# EAGLE board 5.4 (EAGLE 9.7.0)

Size 113.05 x 53.5 mm. Coordinates in mm from the lower left corner, seen from the top.
Outline: 0,0 113.05,0 113.05,53.5 0,53.5 0,0
Copper layers (1*16): Top 0.035mm / dielectric 1.5mm / Bottom 0.035mm
Design rules "default": minimum track width 6mil, minimum drill 0.35mm, track to track 6mil, track to pad 6mil, pad to pad 6mil, via to via 6mil, smd to smd 6mil, copper to edge 40mil, drill to drill 6mil, minimum pad ring 10mil, minimum via ring 8mil, stop-mask expansion 4mil, vias tented up to drill 0mil, thermal gap 10mil

## Footprints (pad centres in the part's own frame; a part is rotated, then mirrored left to right if it is on the bottom)
BATTERY-GENERIC = drill 1.118 pad 3.15 octagon: + 2.54,0; - -2.54,0
LEDRD254W60D565H860B_G = drill 0.981 pad 1.581: 1 -1.27,0; 2 1.27,0
LEDRD254W60D565H860B_Y = drill 0.981 pad 1.581: 1 -1.27,0; 2 1.27,0
LEDRD254W60D565H860B_B = drill 0.981 pad 1.581: 1 -1.27,0; 2 1.27,0
RESAD1016W63L850D250B = drill 0.83 pad 1.43: 1 -5.08,0; 2 5.08,0
SWITCH-SPDT-PTH-8.5X3.7MM = drill 1.016 pad 1.88: 1 -2.54,0; 2 0,0; 3 2.54,0
DIP762W53P254L1969H508Q16B = drill 0.743 pad 1.343: 1 -3.81,8.89; 2 -3.81,6.35; 3 -3.81,3.81; 4 -3.81,1.27; 5 -3.81,-1.27; 6 -3.81,-3.81; 7 -3.81,-6.35; 8 -3.81,-8.89; 9 3.81,-8.89; 10 3.81,-6.35; 11 3.81,-3.81; 12 3.81,-1.27; 13 3.81,1.27; 14 3.81,3.81; 15 3.81,6.35; 16 3.81,8.89

## Placement (x,y rotation side)
BAT2  4.5V  [BATTERY-GENERIC]  8.26,25.62 270 top
D1  GREEN  [LEDRD254W60D565H860B_G]  21.89,21.67 180 top
D2  GREEN  [LEDRD254W60D565H860B_G]  29.51,21.67 180 top
D3  GREEN  [LEDRD254W60D565H860B_G]  37.13,21.67 180 top
D4  GREEN  [LEDRD254W60D565H860B_G]  44.75,21.67 180 top
D5  YELLOW  [LEDRD254W60D565H860B_Y]  54.91,21.67 180 top
D6  YELLOW  [LEDRD254W60D565H860B_Y]  62.53,21.67 180 top
D7  YELLOW  [LEDRD254W60D565H860B_Y]  70.15,21.67 180 top
D8  YELLOW  [LEDRD254W60D565H860B_Y]  77.77,21.67 180 top
D9  BLUE  [LEDRD254W60D565H860B_B]  47.29,34.37 180 top
D10  BLUE  [LEDRD254W60D565H860B_B]  54.91,34.37 180 top
D11  BLUE  [LEDRD254W60D565H860B_B]  62.53,34.37 180 top
D12  BLUE  [LEDRD254W60D565H860B_B]  70.15,34.37 180 top
D13  BLUE  [LEDRD254W60D565H860B_B]  77.77,34.37 180 top
R1  220  [RESAD1016W63L850D250B]  46.02,44.53 90 top
R2  220  [RESAD1016W63L850D250B]  53.64,44.53 90 top
R3  220  [RESAD1016W63L850D250B]  61.26,44.53 90 top
R4  220  [RESAD1016W63L850D250B]  68.88,44.53 90 top
R5  220  [RESAD1016W63L850D250B]  20.62,8.97 90 top
R6  220  [RESAD1016W63L850D250B]  28.24,8.97 90 top
R7  220  [RESAD1016W63L850D250B]  35.86,8.97 90 top
R8  220  [RESAD1016W63L850D250B]  43.48,8.97 90 top
R9  220  [RESAD1016W63L850D250B]  53.64,8.97 90 top
R10  220  [RESAD1016W63L850D250B]  61.26,8.97 90 top
R11  220  [RESAD1016W63L850D250B]  68.88,8.97 90 top
R12  220  [RESAD1016W63L850D250B]  76.5,8.97 90 top
R13  220  [RESAD1016W63L850D250B]  76.5,44.53 90 top
S1  TOGGLE  [SWITCH-SPDT-PTH-8.5X3.7MM]  23.16,16.59 0 top
S2  TOGGLE  [SWITCH-SPDT-PTH-8.5X3.7MM]  30.78,16.59 0 top
S3  TOGGLE  [SWITCH-SPDT-PTH-8.5X3.7MM]  38.4,16.59 0 top
S4  TOGGLE  [SWITCH-SPDT-PTH-8.5X3.7MM]  46.02,16.59 0 top
S5  TOGGLE  [SWITCH-SPDT-PTH-8.5X3.7MM]  56.18,16.59 0 top
S6  TOGGLE  [SWITCH-SPDT-PTH-8.5X3.7MM]  63.8,16.59 0 top
S7  TOGGLE  [SWITCH-SPDT-PTH-8.5X3.7MM]  71.42,16.59 0 top
S8  TOGGLE  [SWITCH-SPDT-PTH-8.5X3.7MM]  79.04,16.59 0 top
U1  74HC283_PDIP  [DIP762W53P254L1969H508Q16B]  98.09,25.48 90 top

## Library data of the parts
BAT2 R1-R13 S1-S8 U1 = Tinkercad
D1-D4 = Tinkercad; CATEGORY: Opto-Electronic; SUB-CATEGORY: LED; VALUE: LED_GREEN
D5-D8 = Tinkercad; CATEGORY: Opto-Electronic; SUB-CATEGORY: LED; VALUE: LED_YELLOW
D9-D13 = Tinkercad; CATEGORY: Opto-Electronic; SUB-CATEGORY: LED; VALUE: LED_BLUE

## Nets
BAT2+: BAT2.+ S1.3 S2.3 S3.3 S4.3 S5.3 S6.3 S7.3 S8.3 U1.16
BAT2-: BAT2.- R1.2 R2.2 R3.2 R4.2 R5.1 R6.1 R7.1 R8.1 R9.1 R10.1 R11.1 R12.1 R13.2 U1.7 U1.8
D9_C: D9.2 R1.1
D10_C: D10.2 R2.1
D12_C: D12.2 R4.1
D13_C: D13.2 R13.1
S1_O: D1.2 R5.2 S1.1
S2_O: D2.2 R6.2 S2.1
S3_O: D3.2 R7.2 S3.1
S4_O: D4.2 R8.2 S4.1
S5_O: D5.2 R9.2 S5.1
S6_O: D6.2 R10.2 S6.1
S7_O: D7.2 R11.2 S7.1
S8_O: D8.2 R12.2 S8.1
U1_A0: D4.1 S4.2 U1.5
U1_A1: D3.1 S3.2 U1.3
U1_A2: D1.1 S1.2 U1.14
U1_A3: D2.1 S2.2 U1.12
U1_B0: D8.1 S8.2 U1.6
U1_B1: D7.1 S7.2 U1.2
U1_B2: D5.1 S5.2 U1.15
U1_B3: D6.1 S6.2 U1.11
U1_COUT: D9.1 U1.9
U1_S0: D12.1 U1.4
U1_S1: D13.1 U1.1
U1_S2: D11.2 R3.1 U1.13
U1_S3: D10.1 U1.10

## Tracks (layer width: path | path; a pad name or v marks a point on that pad's centre or on a via)
BAT2+  (9 unrouted)
BAT2-  (15 unrouted)
D9_C  (1 unrouted)
D10_C  (1 unrouted)
D12_C  (1 unrouted)
D13_C  (1 unrouted)
S1_O  (2 unrouted)
S2_O  (2 unrouted)
S3_O  (2 unrouted)
S4_O  (2 unrouted)
S5_O  (2 unrouted)
S6_O  (2 unrouted)
S7_O  (2 unrouted)
S8_O  (2 unrouted)
U1_A0  (2 unrouted)
U1_A1  (2 unrouted)
U1_A2  (2 unrouted)
U1_A3  (2 unrouted)
U1_B0  (2 unrouted)
U1_B1  (2 unrouted)
U1_B2  (2 unrouted)
U1_B3  (2 unrouted)
U1_COUT  (1 unrouted)
U1_S0  (1 unrouted)
U1_S1  (1 unrouted)
U1_S2  (2 unrouted)
U1_S3  (1 unrouted)